# EAGLE board dhruv_board (EAGLE 9.7.0)
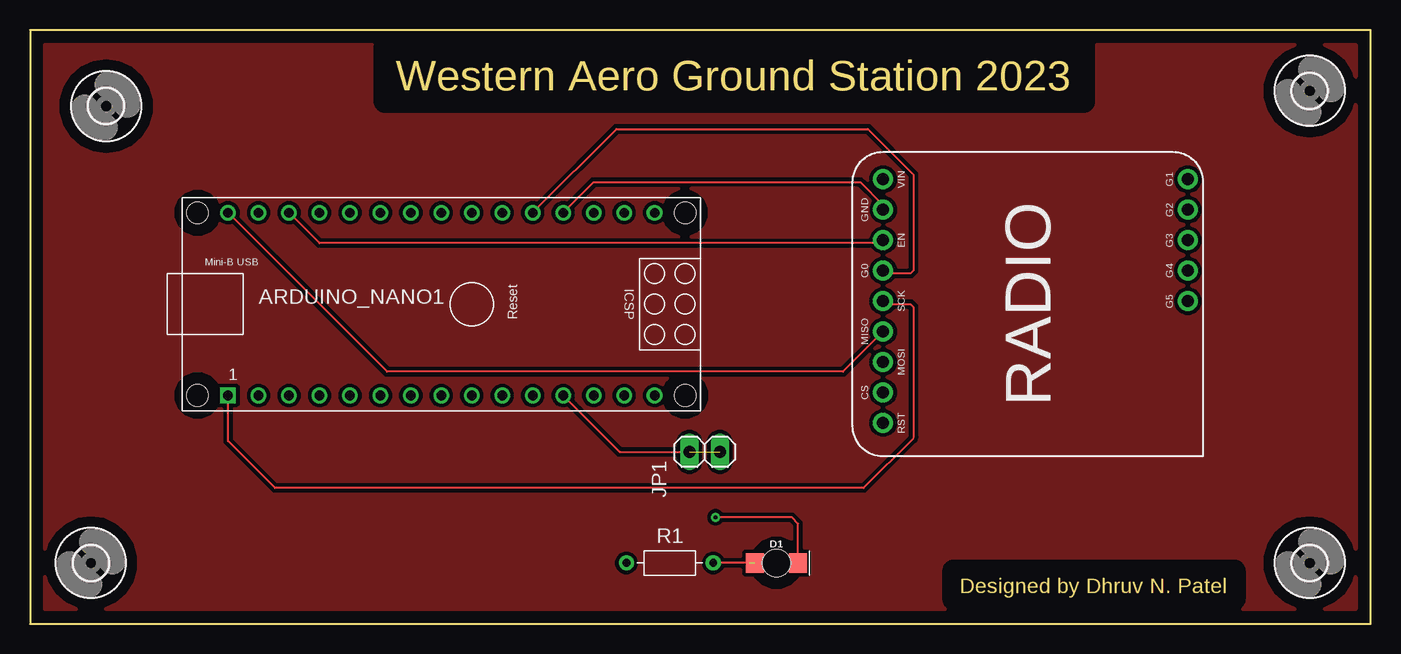
[diagram p0: board, top side]
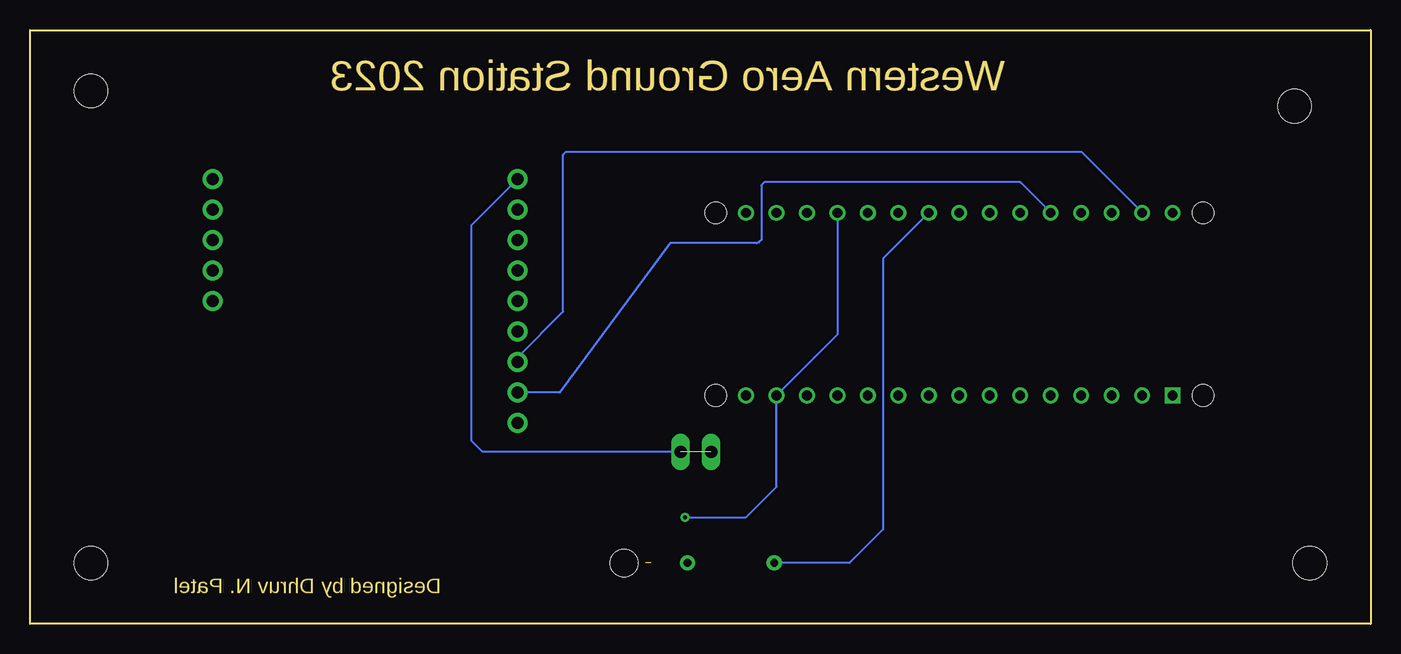
[diagram p1: board, bottom side, seen from below]

Size 111.76 x 49.53 mm. Coordinates in mm from the lower left corner, seen from the top.
Outline: 0,49.53 0,0 111.76,0 111.76,49.53 0,49.53
Copper layers (1*16): Top / Bottom
Stack-up Default Layer Stack: Top User Defined 0.035mm / Dielectric-1 User Defined 1.5mm / Bottom User Defined 0.035mm
Design rules: minimum copper width 6mil, minimum drill size 0.35mm, copper clearance wire_polygon to wire_polygon 6mil, copper clearance wire_polygon to pad_smd 6mil, copper clearance wire_polygon to via 6mil, copper clearance pad_smd to pad_smd 6mil, copper clearance pad_smd to via 6mil, copper clearance via to via 6mil, copper clearance smd to pad (same net) 6mil, copper clearance smd to via (same net) 6mil, copper clearance smd to smd (same net) 6mil, dimension clearance 40mil, restrict clearance 0mil, drill distance 6mil, keepout clearance 0mil

## Footprints (pad centres in the part's own frame; a part is rotated, then mirrored left to right if it is on the bottom)
ARDUINO_NANO = drill 0.8 square: 1 -20.32,-7.62 | drill 0.8: 2 -17.78,-7.62; 3 -15.24,-7.62; 4 -12.7,-7.62; 5 -10.16,-7.62; 6 -7.62,-7.62; 7 -5.08,-7.62; 8 -2.54,-7.62; 9 0,-7.62; 10 2.54,-7.62; 11 5.08,-7.62; 12 7.62,-7.62; 13 10.16,-7.62; 14 12.7,-7.62; 15 15.24,-7.62; 16 15.24,7.62; 17 12.7,7.62; 18 10.16,7.62; 19 7.62,7.62; 20 5.08,7.62; 21 2.54,7.62; 22 0,7.62; 23 -2.54,7.62; 24 -5.08,7.62; 25 -7.62,7.62; 26 -10.16,7.62; 27 -12.7,7.62; 28 -15.24,7.62; 29 -17.78,7.62; 30 -20.32,7.62 | hole 1.778: -22.86,-7.62; -22.86,7.62; 17.78,7.62; 17.78,-7.62
LED-1206-BOTTOM = smd 1.5 x 1.6: A -1.8,0; C 1.8,0 | hole 2.3: 0,0
2,8 = hole 2.8: 0,0
1X02 = drill 1.016 long: 1 -1.27,0; 2 1.27,0
RESAD724W46L381D178B = drill 0.66 pad 1.26: 1 -3.62,0; 2 3.62,0
ADAFRUIT_RFM95W_LORA_RADIO = drill 1 pad 1.676: 1 2.29,-26.67; 2 4.83,-26.67; 3 7.37,-26.67; 4 9.91,-26.67; 5 12.45,-26.67; 6 14.99,-26.67; 7 17.53,-26.67; 8 20.07,-26.67; 9 22.61,-26.67; 10 2.29,-1.27; 11 4.83,-1.27; 12 7.37,-1.27; 13 9.91,-1.27; 14 12.45,-1.27

## Placement (x,y rotation side)
ARDUINO_NANO1  [ARDUINO_NANO]  36.83,26.67 0 top
D1  [LED-1206-BOTTOM]  62.23,5.08 0 top
H1  MOUNT-HOLE2.8  [2,8]  5.08,5.08 0 top
H2  MOUNT-HOLE2.8  [2,8]  106.68,5.08 0 top
H3  MOUNT-HOLE2.8  [2,8]  106.68,44.45 0 top
H4  MOUNT-HOLE2.8  [2,8]  6.35,43.18 0 top
JP1  PINHD-1X2  [1X02]  56.24,14.35 0 top
R1  220  [RESAD724W46L381D178B]  53.34,5.08 0 top
U1  ADAFRUIT_RFM95W_LORA_RADIO  [ADAFRUIT_RFM95W_LORA_RADIO]  97.79,39.37 270 top

## Library data of the parts
ARDUINO_NANO1 = ArduinoNanoV30
D1 = SparkFun-LED
H1-H4 = holes
JP1 = Connector; CATEGORY: Headers; DESCRIPTION: Header, Straight, 2 Position; MANUFACTURER: Generic; MPN: Generic; OPERATING_TEMPERATURE: Generic; PART_STATUS: Active; PITCH: 0.100" (2.54mm); ROHS_COMPLIANCE: Generic; SERIES: Generic; SUB-CATEGORY: Headers, Male Pins; TYPE: Board to Board or Cable, Unshrouded, Through Hole, Straight
R1 = Resistor; CATEGORY: Resistor; SUB-CATEGORY: Fixed
U1 = AERO_Eagle_Library

## Nets
CS: ARDUINO_NANO1.26 U1.8
D9: U1.9
EN: ARDUINO_NANO1.28 U1.3
G0: ARDUINO_NANO1.20 U1.4
GND: ARDUINO_NANO1.14 ARDUINO_NANO1.19 D1.C U1.2
LED1: ARDUINO_NANO1.22 R1.1
LORA3.3V: ARDUINO_NANO1.12 JP1.1 JP1.2 U1.1
MISO: ARDUINO_NANO1.30 U1.6
MOSI: ARDUINO_NANO1.29 U1.7
N$1: D1.A R1.2
RST: ARDUINO_NANO1.27
SCK: ARDUINO_NANO1.1 U1.5
VIN: ARDUINO_NANO1.15

## Tracks (layer width: path | path; a pad name or v marks a point on that pad's centre or on a via)
CS
  Bottom 0.152: ARDUINO_NANO1.26 29.21,36.83 50.55,36.83 50.8,36.58 50.8,32 50.98,31.82 51.16,31.75 58.42,31.75 67.59,19.3 U1.8
EN
  Top 0.152: ARDUINO_NANO1.28 24.13,31.75 71.12,31.75 U1.3
G0
  Top 0.152: ARDUINO_NANO1.20 48.89,41.27 69.85,41.27 73.66,37.47 73.66,29.48 73.41,29.22 71.12,29.22 U1.4
GND  (via drill 0.35)
  Top 0.152: ARDUINO_NANO1.19 46.99,36.83 69.22,36.83 71.12,34.93 U1.2 | D1.C 64.03,8.36 63.5,8.89 v57.15,8.89
  Bottom 0.152: ARDUINO_NANO1.19 44.45,24.13 ARDUINO_NANO1.14 49.53,11.43 52.07,8.89 v57.15,8.89
LED1
  Bottom 0.152: R1.1 43.43,5.08 40.64,7.87 40.64,30.48 ARDUINO_NANO1.22
LORA3.3V  (1 unrouted)
  Top 0.152: ARDUINO_NANO1.12 49.15,14.35 JP1.1
  Bottom 0.152: JP1.2 74.04,14.35 74.93,15.24 74.93,33.27 U1.1 | ARDUINO_NANO1.12
MISO
  Top 0.152: U1.6 67.77,21.03 29.77,21.03 ARDUINO_NANO1.30
MOSI
  Bottom 0.152: ARDUINO_NANO1.29 24.13,39.37 67.06,39.37 67.31,39.12 67.31,26.03 71.12,22.23 U1.7
N$1  (1 unrouted)
  Top 0.152: 59.99,5.08 R1.2
N$2
  pour Top (isolate 0.305): 0,49.53 111.76,49.53 111.76,0 0,0
SCK
  Top 0.152: ARDUINO_NANO1.1 16.51,15.24 20.42,11.33 69.49,11.33 73.59,15.42 73.66,15.6 73.66,26.42 73.41,26.67 71.12,26.67 U1.5

## Text on the board
Dimension: Western Aero Ground Station 2023 | Designed by Dhruv N. Patel